# EAGLE board ASL2111 (EAGLE 6.2)
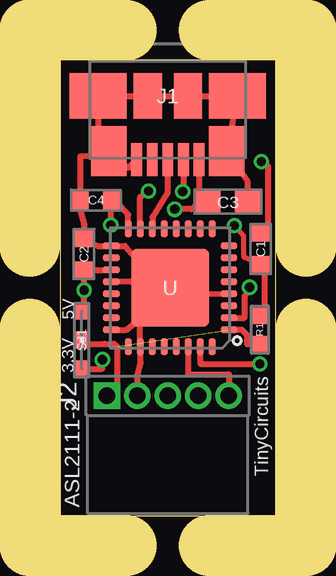
[diagram p0: board, top side]
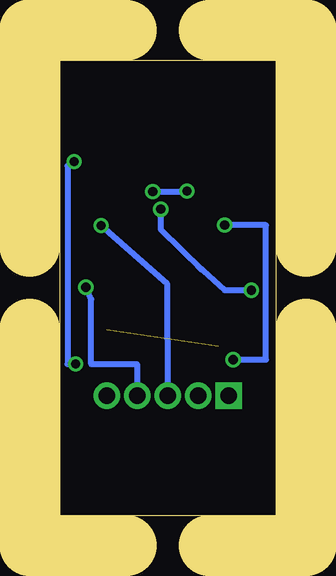
[diagram p1: board, bottom side, seen from below]

Size 9 x 19 mm. Coordinates in mm from the lower left corner, seen from the top.
Outline: 0,0 9,0 9,19 0,19 0,0
Copper layers (1*16): Top 0.035mm / dielectric 1.5mm / Bottom 0.035mm
Design rules: minimum track width 8mil, minimum drill 15mil, track to track 6mil, track to pad 6mil, pad to pad 6mil, via to via 6mil, smd to smd 6mil, copper to edge 6mil, drill to drill 8mil, minimum pad ring 8mil, minimum via ring 5mil, stop-mask expansion 4mil, vias tented up to drill 25mil, thermal gap 10mil
Net classes: 2 gnd: width 0.305 mm, drill 0.559 mm, clearance 0.254 mm
Milling: 10 lines

## Footprints (pad centres in the part's own frame; a part is rotated, then mirrored left to right if it is on the bottom)
C0402 = smd 0.7 x 0.9: 1 -0.65,0; 2 0.65,0
C0603 = smd 1.1 x 1: 1 -0.85,0; 2 0.85,0
MICRO_USB = smd 1.38 x 0.45: 1 2.66,1.3; 2 2.66,0.65; 3 2.66,0; 4 2.66,-0.65; 5 2.66,-1.3 | smd 2.1 x 1.475: P1 2.3,-2.462; P2 2.3,2.462 | smd 1.9 x 2.375: P3 0,2.913; P4 0,-2.913 | smd 1.9 x 1.175: P5 0,0.838; P6 0,-0.838
1X5_.05_RA_TH_RECPT = drill 0.7 pad 1.016 square: 1 0,2.54 | drill 0.7 pad 1.016: 2 0,1.27; 3 0,0; 4 0,-1.27; 5 0,-2.54
0402 = smd 0.7 x 0.6: 1 -0.6,0; 2 0.6,0
JUMPER_0402 = smd 0.7 x 0.6: 1 0,0; 2 -1.2,0; 3 1.2,0
MLF32 = smd 0.7 x 0.28: 1 -2.45,1.75; 2 -2.45,1.25; 3 -2.45,0.75; 4 -2.45,0.25; 5 -2.45,-0.25; 6 -2.45,-0.75; 7 -2.45,-1.25; 8 -2.45,-1.75; 17 2.45,-1.75; 18 2.45,-1.25; 19 2.45,-0.75; 20 2.45,-0.25; 21 2.45,0.25; 22 2.45,0.75; 23 2.45,1.25; 24 2.45,1.75 | smd 0.28 x 0.7: 9 -1.75,-2.45; 10 -1.25,-2.45; 11 -0.75,-2.45; 12 -0.25,-2.45; 13 0.25,-2.45; 14 0.75,-2.45; 15 1.25,-2.45; 16 1.75,-2.45; 25 1.75,2.45; 26 1.25,2.45; 27 0.75,2.45; 28 0.25,2.45; 29 -0.25,2.45; 30 -0.75,2.45; 31 -1.25,2.45; 32 -1.75,2.45 | smd 3.254 x 3.254: 33 0,0

## Placement (x,y rotation side)
C1  0.1uF  [C0402]  8.38,11.12 270 top
C2  0.1uF  [C0402]  1.01,10.9 90 top
C3  10uF  [C0603]  7.01,13.09 0 top
C4  0.1uF  [C0402]  1.51,13.16 180 top
J1  47346-0001  [MICRO_USB]  4.5,17.5 270 top
J2  LPPB051NGCN-RC  [1X5_.05_RA_TH_RECPT]  4.5,5 90 top
R1  10.0K  [0402]  8.34,7.75 270 top
SJ1  JUMPER  [JUMPER_0402]  0.91,7.32 90 top
U  FT232RQ  [MLF32]  4.6,9.5 180 top
U$1  [DOCFIELD-TINYCIRCUITS-PCB]  28.5,-11 0 top  (outside the outline)

## Library data of the parts
C1 C4 = tinycircuits; DATABASE: ./../../../../Eagle/AkroSense-PartsDB.txt; PARTNO: AS-ITM-00008
C2 = tinycircuits; PARTNO: AS-ITM-00008
C3 = tinycircuits; PARTNO: AS-ITM-00002
J1 = tinycircuits; PARTNO: AS-ITM-00021
J2 = tinycircuits; PARTNO: AS-ITM-00037
R1 = tinycircuits; PARTNO: AS-ITM-00032
SJ1 = tinycircuits; PARTNO: AS-ITM-00033
U = tinycircuits; PARTNO: AS-ITM-00029
U$1 = tinycircuits; NO_BOM: TRUE

## Nets
+3V3: C4.1 SJ1.2 U.16
+5V: C2.1 C3.1 J1.1 SJ1.3 U.19
DTR: C1.1 U.31
GND: C2.2 C3.2 C4.2 J1.5 J1.P1 J1.P2 J1.P3 J1.P4 J1.P5 J1.P6 J2.2 U.4 U.17 U.20 U.24 U.26 U.33
N$5: J1.2 U.15
N$6: J1.3 U.14
RESET: C1.2 J2.3 R1.1
RXD: J2.4 U.2
TXD: J2.5 U.30
VCC: J2.1 R1.2 SJ1.1 U.1

## Tracks (layer width: path | path; a pad name or v marks a point on that pad's centre or on a via)
+3V3  (via drill 0.38)
  Top 0.254: U.16 2.85,12.53 2.84,12.55 | 2.81,12.57 2.84,12.55 | 2.84,12.55 2.41,13 1.93,13 C4.1 2.1,13.11 2.13,12.93 v2.13,12.11 | SJ1.2 1.77,6.12 v1.77,6.5
  Bottom 0.254: v1.77,6.5 0.4,6.5 0.4,12.11 v2.13,12.11
+5V  (via drill 0.38)
  Top 0.254: U.19 C2.1 v1.01,9.4 1.01,8.78 SJ1.3 | J1.1 5.81,13.64 C3.1 5.85,13.12 5.48,12.77 v4.8,12.77
  Bottom 0.254: v4.8,12.77 4.8,11.94 3.09,10.26 3.25,10.41 2.13,9.4 v1.01,9.4
DTR  (via drill 0.38)
  Top 0.254: U.31 5.85,6.36 5.89,6.32 v8.34,6.32 | C1.1 8.7,12.16 8.7,14.56 v8.4,14.76
  Bottom 0.254: 8.27,6.32 v8.34,6.32 8.68,6.32 8.68,14.58 v8.4,14.76
GND
  Top 0.254: 1.59,14.95 J1.P4 J1.P6 J1.P5 J1.P3 J1.P2 7.84,13.94 C3.2 | 1.59,14.95 J1.P1 2.84,14.5 J1.5 | U.4 4.34,9.23 U.33 | U.33 3.17,9.2 3.45,9.47 2.97,9.75 U.20 | U.33 3.83,9.97 3.83,9.98 2.71,11.25 U.17 1.57,11.25 C2.2 1.01,12.14 0.88,12.6 C4.2 0.86,14.37 0.86,14.98 1.53,15.01 1.59,14.95 | U.24 2.77,7.75 2.79,7.77 2.79,7.75 3.28,8.15 | 3.28,8.15 3.65,8.28 3.68,8.28 U.33 | J2.2 3.23,5.85 3.37,6.35 3.37,7.03 U.26 3.35,8.03 3.28,8.15
N$5  (via drill 0.38)
  Top 0.254: J1.2 5.15,13.54 v5.12,13.51 | U.15 3.35,11.87 3.35,13.28 v3.7,13.54
  Bottom 0.254: v5.12,13.51 3.75,13.51 v3.7,13.54
N$6
  Top 0.254: J1.3 4.49,14.14 4.49,13.46 3.86,12.44 3.86,11.8 U.14
RESET  (via drill 0.38)
  Top 0.203: v7.28,12.09 7.66,11.66 7.66,10.79 C1.2
  Top 0.254: R1.1 8.34,8.45 8.55,8.66 8.55,10.2 C1.2
  Bottom 0.254: J2.3 4.52,9.65 v7.28,12.09
RXD  (via drill 0.38)
  Top 0.254: U.2 7.69,8.25 7.72,8.28 7.72,9.14 v7.92,9.52
  Bottom 0.254: J2.4 5.79,4.99 5.79,6.32 7.69,6.32 7.69,9.02 v7.92,9.52
TXD
  Top 0.254: U.30 5.35,5.92 5.38,5.89 7.03,5.89 7.05,5.87 7.05,5.02 J2.5
VCC  (1 unrouted)
  Top 0.254: R1.2 7.83,7.15 7.82,7.14 7.82,7.52 7.59,7.75 U.1 | SJ1.1 0.98,7.16 1.85,7.16 2.25,7.16 2.38,7.06 2.38,5.4 J2.1

## Text on the board
tPlace: 5V | 3.3V | TinyCircuits | ASL2111-2
Document: FABRICATION DRAWING | NOTES: | 1. PRINTED CIRCUIT BOARD MADE FROM NEMA GRADE FR-4 EPOXY LAMINATE | WITH 1 OUNCE COPPER PLATING AND .024 THICKNESS. | 2. ALL DIMENSIONS ARE GIVEN IN INCHES. | 3. CIRCUIT PATHS ARE FOR REFERENCE ONLY. | 4. HOLE SIZES SHOWN ARE FINISHED DIAMETERS AFTER PLATING. | 5. BOARD PLATED USING REFLOW OR SIMILAR METHOD. | 6. BOARD TO HAVE BLUE SOLDER MASK ON PLATED SURFACES USING WET FILM | 7. SILKSCREEN BOARD USING WHITE INK. | SR100 OR SR1010 EPOXY. EQUIVALENT WET OR DRY FILM MAY BE USED. | 8. THE FOLLOWING INFORMATION APPLIES TO THIS BOARD: | * 2 COPPER LAYERS | * .024 BOARD THICKNESS | * REQUIRES TOP SIDE SILKSCREEN | Released under the Creative Commons Attribution Share-Alike 3.0 License | http://creativecommons.org/licenses/by-sa/3.0 | Original Arduino Uno Design by Team Arduino | LilyPad Arduino Design by Leah Buechley and Sparkfun Electronics | TinyDuino, TinyLily and TinyShield Designs by TinyCircuits | TinyLily Mini - USB | AS-PCB-ASL2111 | 2